# Allegro board MB1063.brd
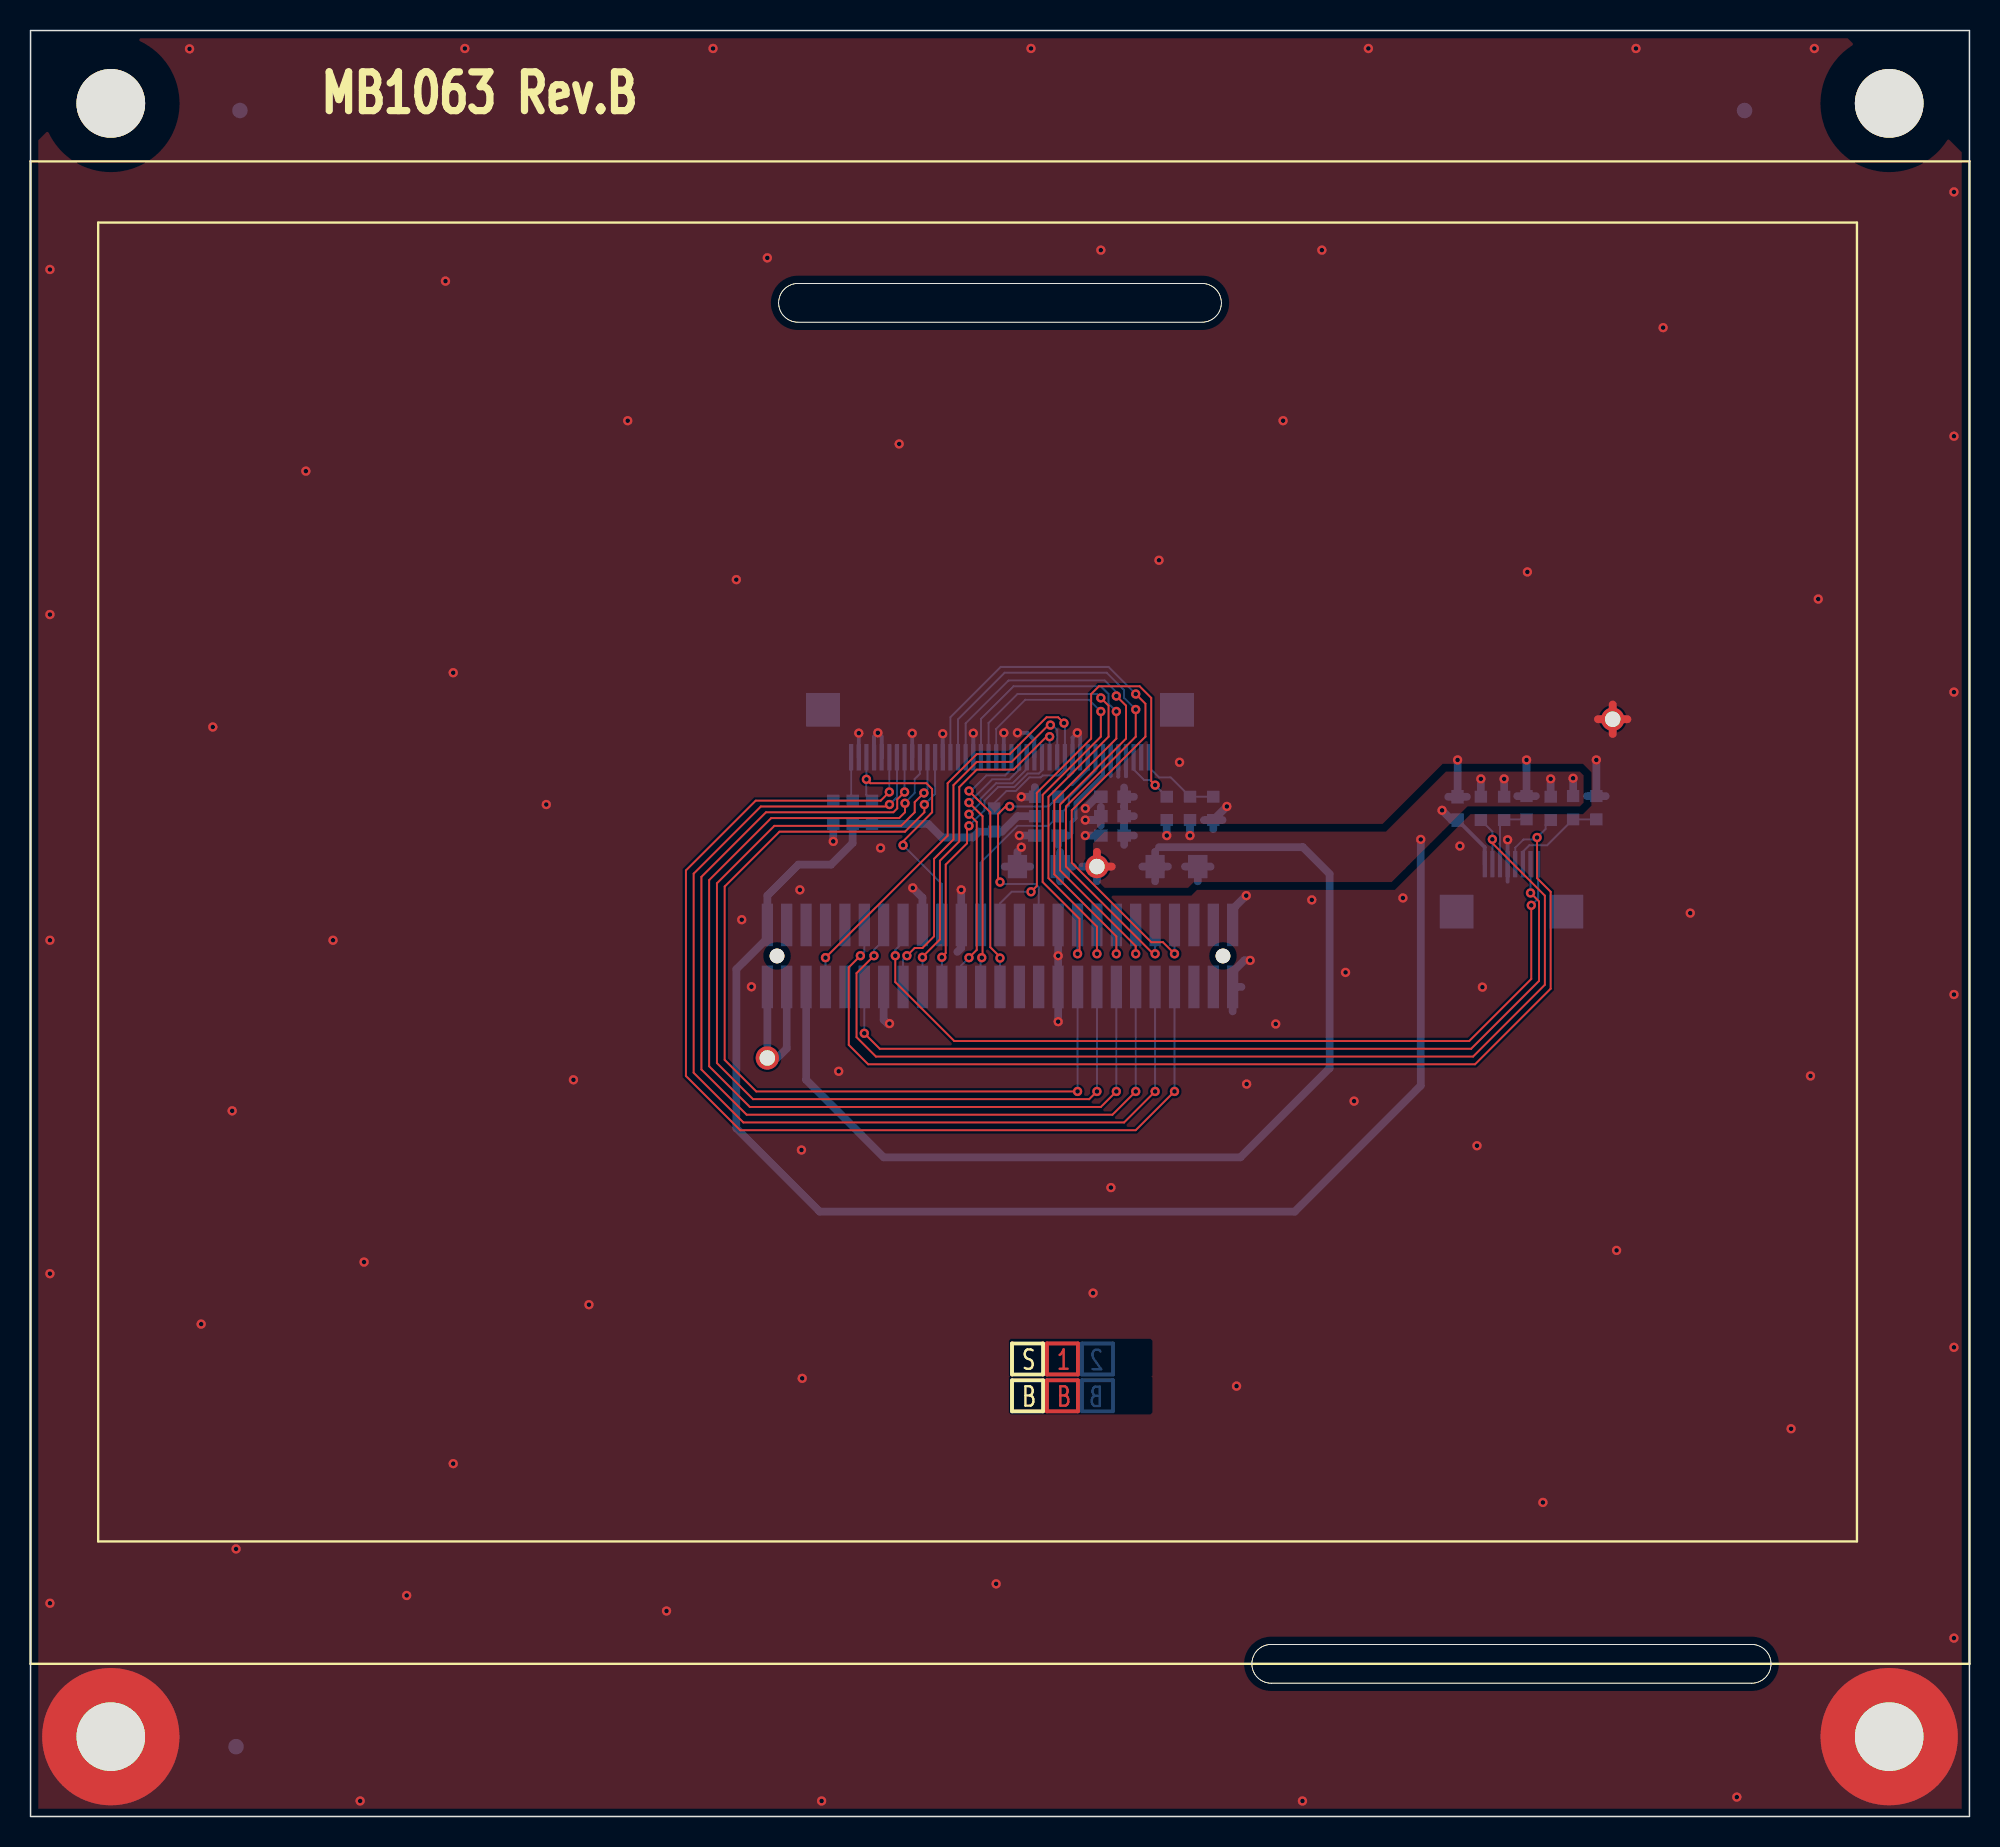
[diagram p0: board, top side]
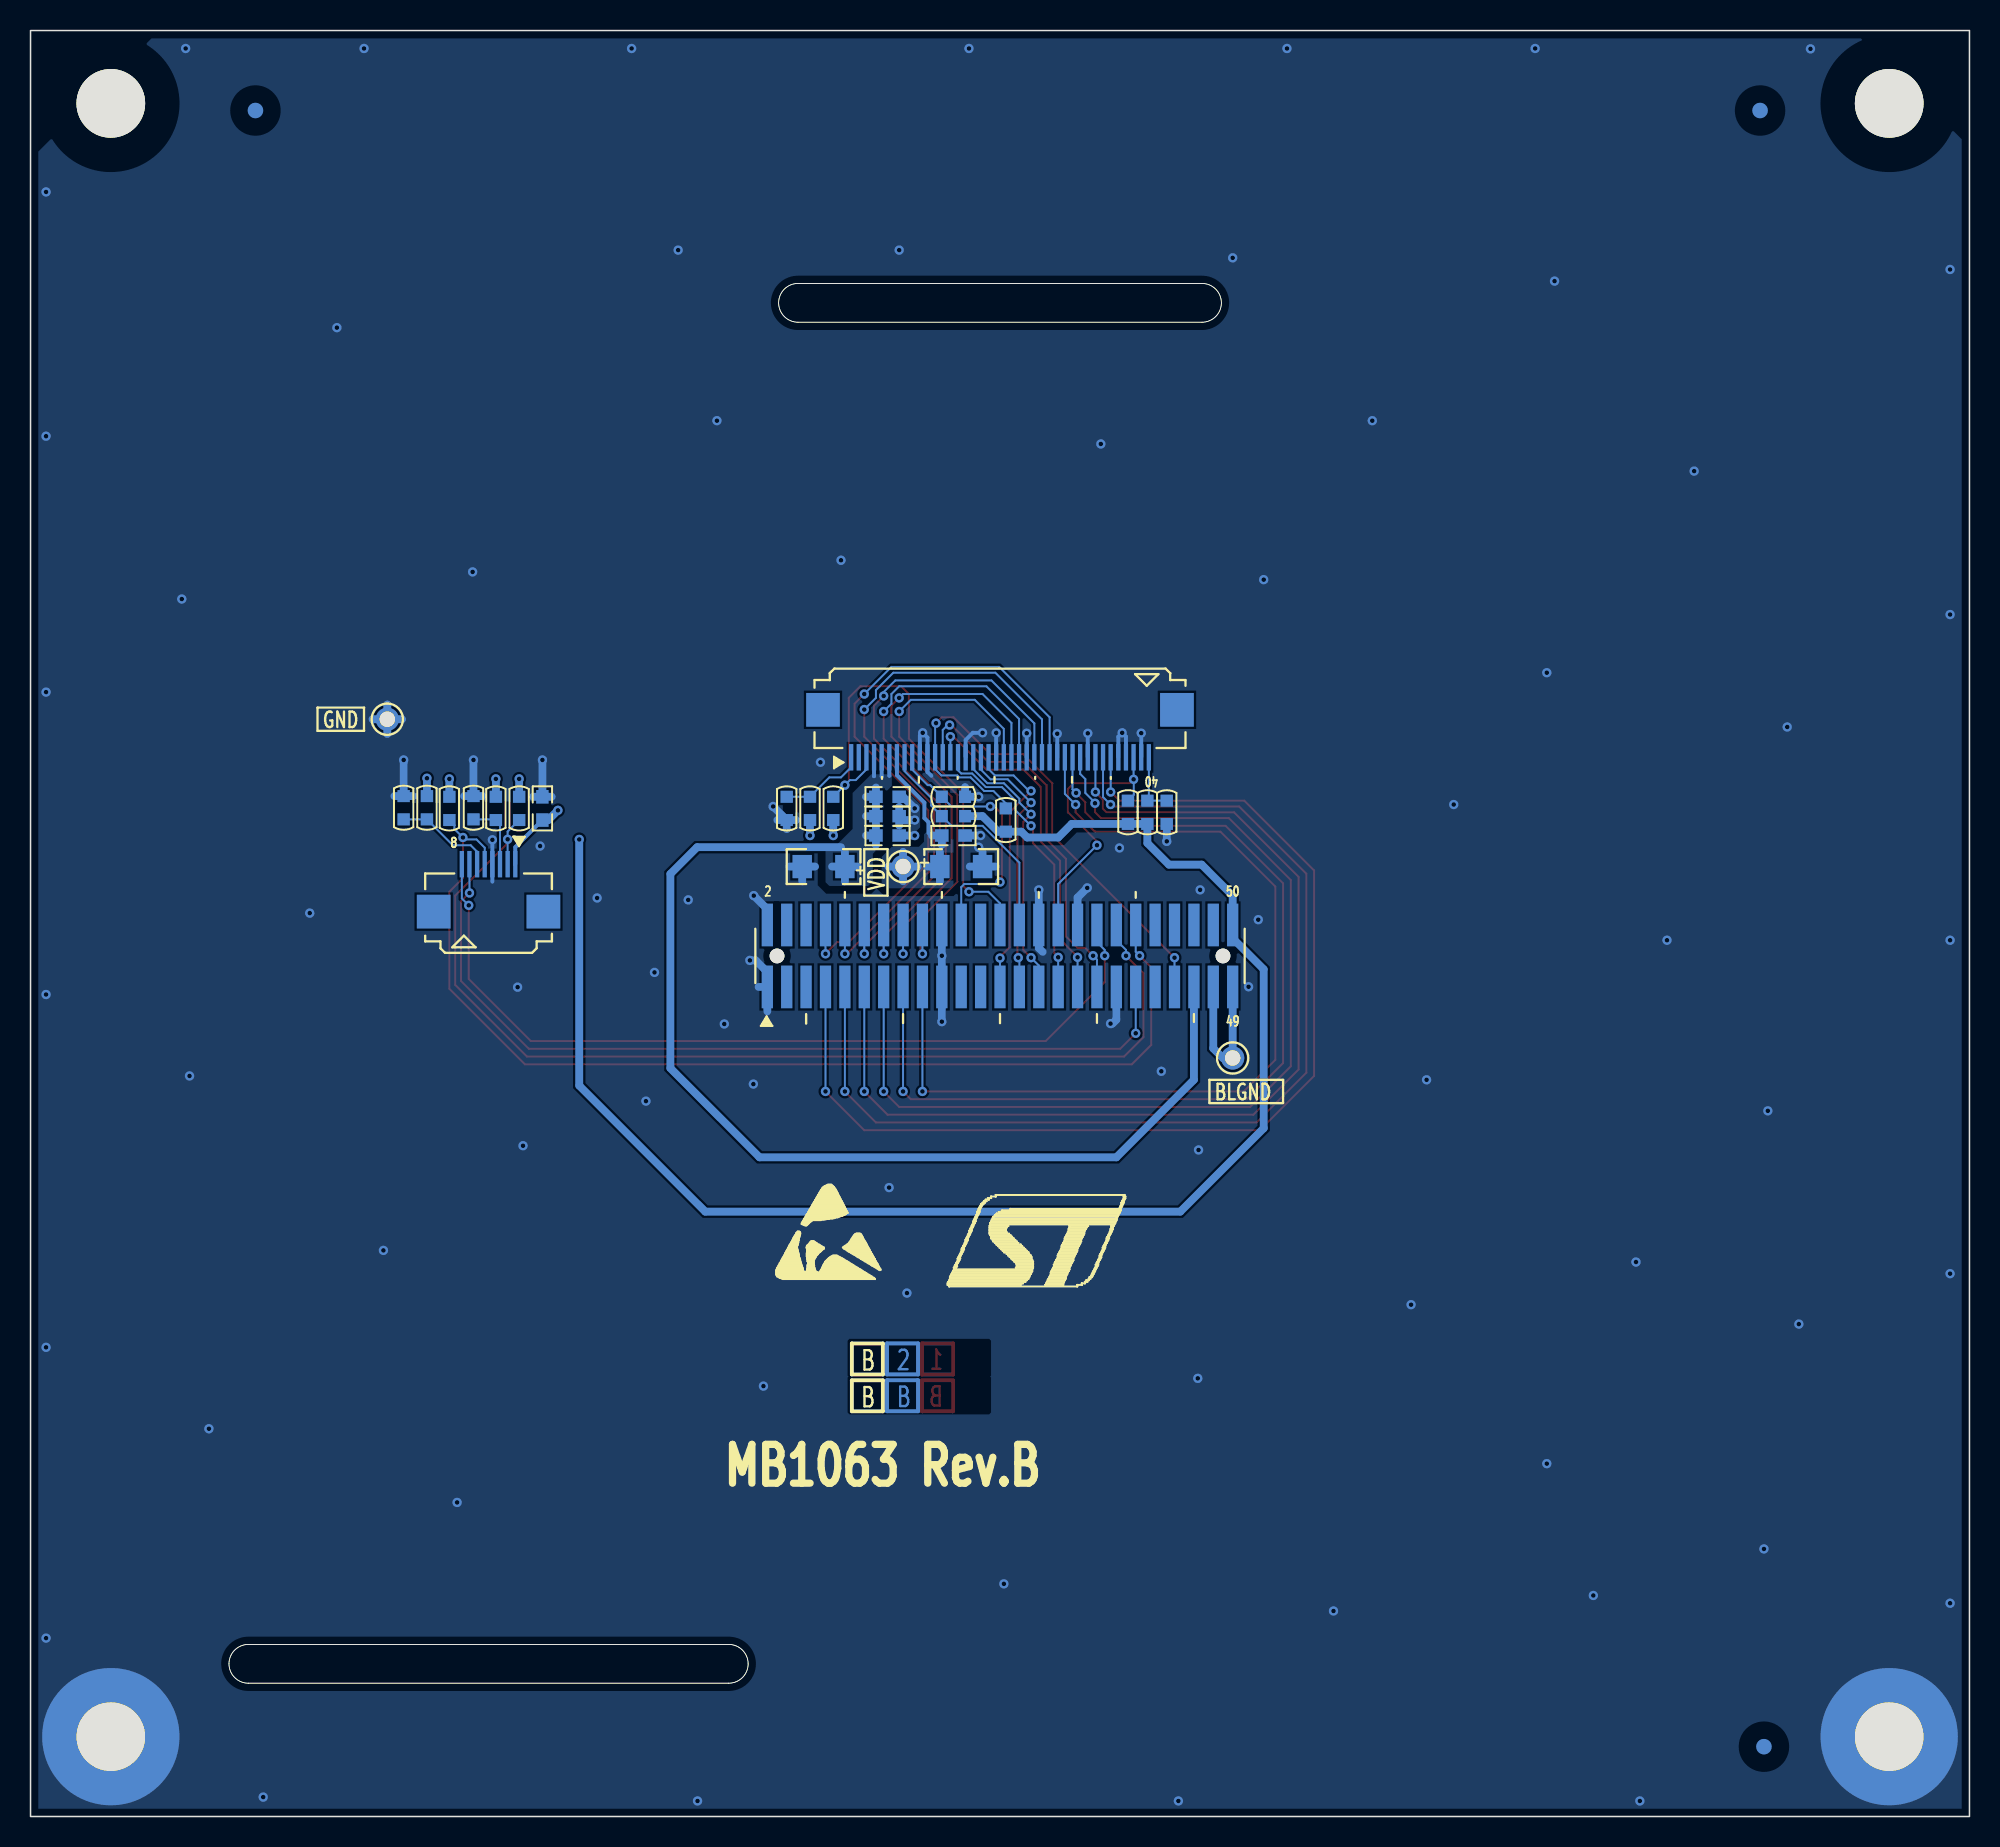
[diagram p1: board, bottom side, seen from below]

Outline 127 x 117 mm; copper layers: TOP, BOTTOM. Coordinates in mm from the lower left corner of the outline.
Outline path: rectangle 0,0 127,117 ; 49,99.16 arc(49.37,100.06) 50.27,100.43 ; 49,99.16 arc(49.37,100.06) 50.27,100.43 ; 49,99.16 arc(49.37,98.26) 50.27,97.89 ; 49,99.16 arc(49.37,98.26) 50.27,97.89 ; 50.27,100.43 76.73,100.43 ; 50.27,100.43 76.73,100.43 ; 76.73,100.43 arc(77.63,100.06) 78,99.16 ; 76.73,100.43 arc(77.63,100.06) 78,99.16 ; 50.27,97.89 76.73,97.89 ; 50.27,97.89 76.73,97.89 ; 76.73,97.89 arc(77.63,98.26) 78,99.16 ; 76.73,97.89 arc(77.63,98.26) 78,99.16 ; 80,10 arc(80.37,10.9) 81.27,11.27 ; 80,10 arc(80.37,10.9) 81.27,11.27 ; 80,10 arc(80.37,9.1) 81.27,8.73 ; 80,10 arc(80.37,9.1) 81.27,8.73 ; 81.27,11.27 112.73,11.27 ; 81.27,11.27 112.73,11.27 ; 112.73,11.27 arc(113.63,10.9) 114,10 ; 112.73,11.27 arc(113.63,10.9) 114,10 ; 81.27,8.73 112.73,8.73 ; 81.27,8.73 112.73,8.73 ; 112.73,8.73 arc(113.63,9.1) 114,10 ; 112.73,8.73 arc(113.63,9.1) 114,10 ; 0,117 127,117 127,0 0,0 0,117

## Placement (name value [footprint] x y rotation side)
C1  4.7uF  [TAN-A]  75.06 62.23 180 bottom
C2  100nF  [0603C]  70.87 66.8 0 bottom
C3  4.7uF  [TAN-A]  66.04 62.23 0 bottom
C4  100nF  [0603C]  66.55 64.26 0 bottom
C5  100nF  [0603C]  93.47 66.04 270 bottom
C6  100nF  [0603C]  70.87 64.26 0 bottom
C7  100nF  [0603C]  70.87 65.53 0 bottom
CN1  089H40-000000-G2-C  [FPC40_0R5_089H40LY-FPC_REV]  73.25 69.25 0 bottom
CN2  P127B-2_25MGF-079-1A  [FTSH-125-01-F-DV]  63.5 56.37 180 bottom
CN3  CSF-2481-081R  [FPC8_0R5_089H08_LY-FPC_REV]  95.25 62.53 180 bottom
H1  POSITION HOLE  [HOLE_C9D4R5]  121.74 5.23 0 top
H2  POSITION HOLE  [HOLE_C9D4R5]  5.26 5.23 0 top
NOREF  -  []  335.28 -81.28 0 top
NOREF#2  -  [unnamed#2]  5.26 112.23 0 top
NOREF#3  Value  []  63.5 59.22 0 top
NOREF#4  -  []  -13.34 -24.13 0 top
NOREF#5  -  [unnamed#2]  121.74 112.23 0 top
NOREF#6  -  []  182.12 73.66 0 top
NOREF#7  -  []  0 0 0 top
NOREF#8  -  []  65.1 26.85 0 top
NOREF#9  -  []  188.21 123.44 0 top
NOREF#10  -  []  65.1 29.26 0 top
NOREF#11  -  [unnamed#3]  112.27 111.76 180 bottom
NOREF#12  -  [unnamed#3]  13.72 111.76 180 bottom
NOREF#13  -  [unnamed#3]  13.46 4.57 180 bottom
R1  [N_A]  [0603R]  75.95 66.04 90 bottom
R2  4K7  [0603R]  53.85 65.79 90 bottom
R3  4K7  [0603R]  66.55 66.8 0 bottom
R4  4K7  [0603R]  55.12 65.79 90 bottom
R5  4K7  [0603R]  74.42 66.04 90 bottom
R6  4K7  [0603R]  66.55 65.53 0 bottom
R7  4K7  [0603R]  77.47 66.04 270 bottom
R8  [N_A]  [0603R]  52.58 65.79 270 bottom
R9  4K7  [0603R]  63.12 65.28 90 bottom
R11  [N_A]  [0603R]  99.57 66.04 270 bottom
R12  [N_A]  [0603R]  95 66.04 270 bottom
R13  [N_A]  [0603R]  101.04 66.08 270 bottom
R14  [N_A]  [0603R]  96.52 66.04 270 bottom
R15  4K7  [0603R]  102.56 66.08 90 bottom
R16  4K7  [0603R]  97.99 66.08 90 bottom
TP1  mco1  [TP]  103.63 71.88 180 bottom
TP2  mco1  [TP]  48.26 49.69 180 bottom
TP3  mco1  [TP]  69.85 62.23 180 bottom

## Library data of the parts
C1 C3 = TAN-A
C2 C4-C7 = 0603C
CN1 = FPC40_0R5_089H40LY-FPC_REV
CN2 = FTSH-125-01-F-DV
CN3 = FPC8_0R5_089H08_LY-FPC_REV
H1 H2 = HOLE_C9D4R5
R1-R9 R11-R16 = 0603R
TP1-TP3 = TP

## Footprints (pads in the part's own frame, mm; a bottom-side part is the same pattern mirrored in y, then rotated)
0603C
  rect 0.889x0.813 smd: 1(-0.762,0) 2(0.762,0)
0603R
  rect 0.787x0.813 smd: 1(-0.762,0) 2(0.762,0)
FPC8_0R5_089H08_LY-FPC_REV
  rect 0.279x1.727 smd: 1(0,-0.14) 2(-0.5,-0.14) 3(-1,-0.14) 4(-1.5,-0.14) 5(-2,-0.14) 6(-2.5,-0.14) 7(-3,-0.14) 8(-3.5,-0.14)
  rect 2.21x2.21 smd: 9(-5.343,-3.25) 10(1.843,-3.25)
FPC40_0R5_089H40LY-FPC_REV
  rect 0.279x1.727 smd: 1(0,-0.14) 2(-0.5,-0.14) 3(-1,-0.14) 4(-1.5,-0.14) 5(-2,-0.14) 6(-2.5,-0.14) 7(-3,-0.14) 8(-3.5,-0.14) 9(-4,-0.14) 10(-4.5,-0.14) 11(-5,-0.14) 12(-5.5,-0.14) 13(-6,-0.14) 14(-6.5,-0.14) 15(-7,-0.14) 16(-7.5,-0.14) 17(-8,-0.14) 18(-8.5,-0.14) 19(-9,-0.14) 20(-9.5,-0.14) 21(-10,-0.14) 22(-10.5,-0.14) 23(-11,-0.14) 24(-11.5,-0.14) 25(-12,-0.14) 26(-12.5,-0.14) 27(-13,-0.14) 28(-13.5,-0.14) 29(-14,-0.14) 30(-14.5,-0.14) 31(-15,-0.14) 32(-15.5,-0.14) 33(-16,-0.14) 34(-16.5,-0.14) 35(-17,-0.14) 36(-17.5,-0.14) 37(-18,-0.14) 38(-18.5,-0.14) 39(-19,-0.14) 40(-19.5,-0.14)
  rect 2.21x2.21 smd: 41(-21.343,-3.25) 42(1.843,-3.25)
FTSH-125-01-F-DV
  round 0.965 hole 0.965 unplated: (-14.605,0) (14.605,0)
  rect 0.737x2.794 smd: 1(-15.24,-2.03) 2(-15.24,2.03) 3(-13.97,-2.03) 4(-13.97,2.03) 5(-12.7,-2.03) 6(-12.7,2.03) 7(-11.43,-2.03) 8(-11.43,2.03) 9(-10.16,-2.03) 10(-10.16,2.03) 11(-8.89,-2.03) 12(-8.89,2.03) 13(-7.62,-2.03) 14(-7.62,2.03) 15(-6.35,-2.03) 16(-6.35,2.03) 17(-5.08,-2.03) 18(-5.08,2.03) 19(-3.81,-2.03) 20(-3.81,2.03) 21(-2.54,-2.03) 22(-2.54,2.03) 23(-1.27,-2.03) 24(-1.27,2.03) 25(0,-2.03) 26(0,2.03) 27(1.27,-2.03) 28(1.27,2.03) 29(2.54,-2.03) 30(2.54,2.03) 31(3.81,-2.03) 32(3.81,2.03) 33(5.08,-2.03) 34(5.08,2.03) 35(6.35,-2.03) 36(6.35,2.03) 37(7.62,-2.03) 38(7.62,2.03) 39(8.89,-2.03) 40(8.89,2.03) 41(10.16,-2.03) 42(10.16,2.03) 43(11.43,-2.03) 44(11.43,2.03) 45(12.7,-2.03) 46(12.7,2.03) 47(13.97,-2.03) 48(13.97,2.03) 49(15.24,-2.03) 50(15.24,2.03)
HOLE_C9D4R5
  round 8.992 hole 4.496: 1(0,0)
TAN-A
  rect 1.27x1.524 smd: 1(1.397,0) 2(-1.397,0)
TP
  round 1.524 hole 1.016: 1(0,0)
unnamed#2
  round 4.496 hole 4.496 unplated: (0,0)
unnamed#3
  round 1.016 smd: (0,0)

## Nets
GND: C1.2 C2.1 C3.2 C4.1 C5.1 C6.1 C7.1 CN1.10 CN1.11 CN1.16 CN1.20 CN1.24 CN1.28 CN1.32 CN1.36 CN1.37 CN1.39 CN2.1 CN2.2 CN2.19 CN2.20 CN2.30 CN2.34 CN2.37 CN3.4 H1.1 H2.1 R3.1 R7.2 R8.2 R15.2 R16.2 TP1.1
VDD: C3.1 C4.2 C5.2 CN1.7 CN2.50 CN3.1 R1.1 R2.1 R4.1 R5.1 R6.1 R9.1 R11.1 R12.1 R13.1 R14.1 TP3.1
B2: CN1.19 CN2.25
B3: CN1.18 CN2.27
B4: CN1.17 CN2.29
B5: CN1.15 CN2.31
B6: CN1.14 CN2.33
B7: CN1.13 CN2.35
BL_CTRL: CN1.12 CN2.43 R9.2
BLGND: CN2.47 CN2.49 TP2.1
BLVDD: C1.1 C2.2 C6.2 C7.2 CN1.4 CN1.5 CN1.6 CN2.45
CLK: CN1.38 CN2.32 R4.2
ENB: CN1.9 CN2.22 R3.2
G2: CN1.27 CN2.8
G3: CN1.26 CN2.10
G4: CN1.25 CN2.12
G5: CN1.23 CN2.14
G6: CN1.22 CN2.16
G7: CN1.21 CN2.18
HSYNC: CN1.3 CN2.26 R5.2
I2C_SCL: CN2.40 CN3.5 R11.2
I2C_SDA: CN2.38 CN3.2 R12.2
INT: CN2.39 CN3.7
NETCN1_1: CN1.1 R1.2 R7.1
NETCN1_40: CN1.40 R2.2 R8.1
NETCN3_3: CN3.3 R14.2 R16.1
NETCN3_6: CN3.6 R13.2 R15.1
R2: CN1.35 CN2.7
R3: CN1.34 CN2.9
R4: CN1.33 CN2.11
R5: CN1.31 CN2.13
R6: CN1.30 CN2.15
R7: CN1.29 CN2.17
RST: CN2.36 CN3.8
VSYNC: CN1.8 CN2.28 R6.2

Pads without a net: CN1 2 41 42; CN2 3 4 5 6 21 23 24 41 42 44 46 48; CN3 9 10

## Via types
v1: diameter 0.61, hole 0.305, TOP to BOTTOM, 161 vias

## Routing (per net, layer and track width the routed paths; a pad name or vN(x,y) marks a point on that pad's centre or on a via; arc(x,y) is an arc through that point)
GND: length 79.2
  TOP w0.508: TP1.1 103.63,72.85 ; TP1.1 104.6,71.88 ; TP1.1 102.67,71.88 ; TP1.1 103.63,70.92
  BOTTOM w0.254: 68,68.17 68.25,68.43 CN1.11 68.25,70.68 v1(68.56,70.99) 68.75,70.81 CN1.10 ; CN1.28 v1(59.75,70.93) ; CN1.32 v1(57.75,70.96) ; CN1.36 55.75,70.74 v1(55.5,70.99) 55.25,70.74 CN1.37 ; CN1.16 65.75,70.52 65.28,70.99 v1(64.64,70.99) ; v1(96.75,63.98) CN3.4 96.75,61.24 ; CN1.24 v1(61.75,70.96) ; CN1.20 v1(63.75,70.99) ; CN1.39 v1(54.25,70.97)
  BOTTOM w0.508: 60.71,56.64 60.96,56.9 CN2.30 v1(60.96,60.71) ; v1(79.88,56.08) 79.5,56.08 78.74,55.32 CN2.1 ; v1(69.09,66.04) 69.85,66.8 C2.1 ; CN2.34 58.42,60.2 v1(57.78,60.83) ; 65.79,67.44 R3.1 v1(64.9,66.8) ; 76.86,65.28 R7.2 ; R7.2 77.47,64.68 ; R7.2 78.08,65.28 ; R7.2 v1(78.36,66.17) ; v1(56.26,51.94) 56.13,51.94 55.88,52.2 CN2.37 ; TP1.1 103.63,72.85 ; TP1.1 104.6,71.88 ; TP1.1 103.63,70.92 ; TP1.1 102.67,71.88 ; v1(67.31,52.07) CN2.19 v1(67.31,56.39) CN2.20 ; R15.2 v1(102.56,69.22) ; R15.2 103.17,66.85 ; R15.2 101.95,66.85 ; CN2.2 78.74,59.44 v1(79.63,60.33) ; 76.45,61.26 C1.2 ; C1.2 77.29,62.23 ; C1.2 75.62,62.23 ; R16.2 98.6,66.85 ; R16.2 97.38,66.85 ; R16.2 v1(97.99,69.22) ; CN2.1 79.31,54.34 ; CN2.1 78.74,52.74 ; 92.86,66.8 C5.1 ; C5.1 94.08,66.8 ; C5.1 v1(93.47,69.22) ; v1(69.09,65.28) 69.85,65.28 C7.1 ; C3.2 64.64,63.2 ; C3.2 63.8,62.23 ; C3.2 65.48,62.23 ; R8.2 v1(52.58,63.88) ; C7.1 70.1,66.14 ; C7.1 70.1,64.92 ; C4.1 v1(64.77,64.26) ; C6.1 v1(69.09,64.26)
  vias: v1(1.27,101.35) v1(1.27,78.74) v1(1.27,57.4) v1(1.27,35.56) v1(1.27,13.97) v1(10.41,115.8) v1(11.18,32.26) v1(11.94,71.37) v1(13.21,46.23) v1(13.46,17.53) v1(18.03,88.14) v1(19.81,57.4) v1(21.59,1.02) v1(21.84,36.32) v1(24.64,14.48) v1(27.18,100.58) v1(27.69,74.93) v1(27.69,23.11) v1(28.45,115.82) v1(33.78,66.29) v1(35.56,48.26) v1(36.58,33.53) v1(39.12,91.44) v1(41.66,13.46) v1(44.7,115.82) v1(46.23,81.03) v1(46.58,58.75) v1(47.22,54.36) v1(48.26,102.11) v1(50.39,60.71) v1(50.5,43.66) v1(50.55,28.7) v1(51.82,1.02) v1(52.93,48.82) v1(55.68,63.45) v1(56.9,89.92) v1(63.25,15.24) v1(64.9,63.5) v1(65.53,115.82) v1(69.6,34.29) v1(70.1,102.62) v1(70.76,41.2) v1(73.91,82.3) v1(75.26,69.06) v1(78.99,28.19) v1(79.65,47.98) v1(81.56,51.92) v1(82.04,91.44) v1(83.31,1.02) v1(83.92,60.05) v1(84.58,102.62) v1(86.13,55.3) v1(86.69,46.86) v1(87.63,115.82) v1(89.89,60.17) v1(93.62,63.58) v1(94.74,43.94) v1(95.1,54.33) v1(98.04,81.53) v1(99.06,20.57) v1(103.89,37.08) v1(105.16,115.82) v1(106.93,97.54) v1(108.71,59.18) v1(111.76,1.27) v1(115.32,25.4) v1(116.59,48.51) v1(116.84,115.82) v1(117.09,79.76) v1(125.98,106.43) v1(125.98,90.42) v1(125.98,73.66) v1(125.98,53.85) v1(125.98,30.73) v1(125.98,11.68)
VDD: length 131.1
  TOP w0.508: 69.85,63.2 TP3.1 70.82,62.23
  BOTTOM w0.254: CN3.1 95.25,63.5 C5.2 ; CN1.7 70.25,68.22 68.45,66.42 68.45,65.41 68.19,65.14 68.19,64.43
  BOTTOM w0.508: 67.44,61.26 67.44,62.23 ; 67.44,62.23 67.44,63.2 ; 67.44,62.23 68.28,62.23 ; R1.1 v1(75.95,64.26) ; R11.1 v1(99.57,67.97) ; R6.1 64.64,65.53 63.63,64.52 R9.1 62.1,64.52 61.72,64.14 59.69,64.14 58.8,65.02 R4.1 R2.1 53.85,63.77 52.44,62.36 50.29,62.36 48.26,60.33 CN2.50 48.26,57.53 46.23,55.5 46.23,45.09 51.69,39.62 82.8,39.62 91.06,47.88 v1(91.06,64.01) ; 68.88,62.23 TP3.1 ; TP3.1 69.85,63.2 ; TP3.1 69.85,61.26 ; TP3.1 70.82,62.23 ; R13.1 v1(101.04,68.02) ; v1(92.46,65.91) 93.09,65.28 C5.2 ; 67.31,63.65 C4.2 67.96,64.26 ; R14.1 v1(96.52,67.97) ; R5.1 v1(74.42,64.26) ; R12.1 v1(95,67.97)
B2: length 17.8
  TOP w0.127: v1(61.47,67.18) 62.87,65.79 62.87,56.95 63.5,56.31 v1(63.5,56.24)
  BOTTOM w0.127: CN2.25 v1(63.5,56.24) ; CN1.19 64.25,68.62 63.83,68.2 62.61,68.2 61.59,67.18 v1(61.47,67.18)
B3: length 17.5
  TOP w0.127: v1(62.31,56.26) 62.36,56.31 62.36,65.53 v1(61.47,66.42)
  BOTTOM w0.127: CN1.18 64.75,68.58 64.12,67.94 62.99,67.94 v1(61.47,66.42) ; v1(62.31,56.26) 62.23,56.18 CN2.27
B4: length 17.9
  TOP w0.127: v1(61.47,65.66) 61.98,65.15 61.98,56.77 v1(61.47,56.26)
  BOTTOM w0.127: v1(61.47,65.66) 62.23,66.42 62.23,66.67 63.25,67.69 64.33,67.69 65.25,68.62 CN1.17 ; CN2.29 60.96,55.75 v1(61.47,56.26)
B5: length 18.8
  TOP w0.127: v1(59.69,56.29) 59.69,56.31 59.94,56.57 59.94,62.36 61.34,63.75 61.34,64.77 v1(61.47,64.9)
  BOTTOM w0.127: CN2.31 v1(59.69,56.29) ; v1(61.47,64.9) 62.48,65.91 62.48,66.55 63.37,67.44 64.43,67.44 65.32,68.33 66.04,68.33 66.25,68.54 CN1.15
B6: length 22.7
  TOP w0.127: v1(58.42,56.29) 58.42,56.31 59.56,57.45 59.56,62.61 60.83,63.88 60.83,67.44 61.98,68.58 64.39,68.58 66.55,70.74 v1(66.75,70.74)
  BOTTOM w0.127: v1(66.75,70.74) CN1.14 ; CN2.33 v1(58.42,56.29)
B7: length 25.2
  TOP w0.127: v1(66.8,71.5) 66.67,71.5 64.26,69.09 61.98,69.09 60.45,67.56 60.45,64.01 59.18,62.74 59.18,57.66 58.42,56.9 57.91,56.9 v1(57.4,56.39)
  BOTTOM w0.127: v1(66.8,71.5) 66.93,71.5 67.25,71.18 CN1.13 ; v1(57.4,56.39) 57.15,56.13 CN2.35
BL_CTRL: length 35.2
  TOP w0.127: v1(67.69,71.63) 67.31,72.01 66.55,72.01 64.14,69.6 61.98,69.6 60.07,67.69 60.07,64.26 v1(52.07,56.26)
  BOTTOM w0.127: CN2.43 v1(52.07,56.26) ; R9.2 63.12,66.37 63.93,67.18 64.54,67.18 65.43,68.07 66.17,68.07 66.29,68.2 67.34,68.2 67.75,68.61 CN1.12 67.75,71.57 v1(67.69,71.63)
BLGND: length 10.2
  BOTTOM w0.508: CN2.47 49.53,50.32 48.9,49.69 TP2.1 CN2.49
BLVDD: length 82.5
  BOTTOM w0.254: CN1.4 71.75,68.15 71.75,68.15 ; 71.25,68.12 71.25,68.13 CN1.5 ; 70.74,68.17 70.75,68.18 CN1.6
  BOTTOM w0.508: C1.1 74.5,62.23 ; C1.1 72.82,62.23 ; C1.1 73.66,61.26 ; C1.1 73.66,63.2 ; C6.2 72.28,64.26 ; C6.2 71.63,64.87 ; C6.2 71.63,63.65 ; 71.63,64.92 C7.2 ; C7.2 71.63,66.14 ; C7.2 72.28,65.53 ; CN2.45 50.8,48.26 55.88,43.18 79.25,43.18 85.09,49.02 85.09,61.75 83.34,63.5 73.91,63.5 ; C2.2 71.63,67.41 ; C2.2 71.63,66.19 ; C2.2 72.28,66.8
CLK: length 18.3
  TOP w0.127: v1(54.75,67.94) 55,67.69 58.67,67.69 59.05,67.31 59.05,65.79 57.15,63.88 v1(57.15,63.63)
  BOTTOM w0.127: CN2.32 59.69,61.09 v1(57.15,63.63) ; CN1.38 v1(54.75,67.94) 54.74,67.93 54.74,66.93 R4.2
ENB: length 17.6
  TOP w0.127: v1(63.5,61.21) 63.37,61.34 63.37,65.67 63.87,66.17 v1(64.14,66.17)
  BOTTOM w0.127: CN2.22 66.04,60.88 65.84,61.09 63.63,61.09 v1(63.5,61.21) ; v1(64.14,66.17) 66.67,66.17 R3.2 68.07,67.56 68.23,67.56 69.25,68.58 CN1.9
G2: length 41.3
  TOP w0.127: v1(72.39,73.53) 73.03,72.9 73.03,70.74 68.2,65.91 68.2,62.48 73.41,57.28 74.17,57.28 v1(74.93,56.52)
  BOTTOM w0.127: CN1.27 60.25,72.01 63.55,75.31 70.61,75.31 v1(72.39,73.53) ; CN2.8 v1(74.93,56.52)
G3: length 39
  TOP w0.127: v1(73.66,56.52) 73.53,56.52 67.82,62.23 67.82,66.17 72.39,70.74 v1(72.39,72.52)
  BOTTOM w0.127: CN1.26 60.75,71.88 63.8,74.93 70.48,74.93 71.63,73.79 71.63,73.28 v1(72.39,72.52) ; CN2.10 v1(73.66,56.52)
G4: length 36.7
  TOP w0.127: v1(71.12,73.41) 71.75,72.77 71.75,70.61 67.44,66.29 67.44,61.98 72.39,57.02 v1(72.39,56.52)
  BOTTOM w0.127: CN1.25 61.25,71.61 64.06,74.42 70.36,74.42 71.12,73.66 v1(71.12,73.41) ; CN2.12 v1(72.39,56.52)
G5: length 34.5
  TOP w0.127: v1(71.12,72.39) 71.12,70.61 67.06,66.55 67.06,61.72 71.12,57.66 v1(71.12,56.52)
  BOTTOM w0.127: CN2.14 v1(71.12,56.52) ; v1(71.12,72.39) 70.61,72.9 70.61,73.53 70.1,74.04 64.39,74.04 62.25,71.9 CN1.23
G6: length 32.3
  TOP w0.127: v1(69.85,56.52) 69.85,58.29 66.67,61.47 66.67,66.8 70.61,70.74 70.61,72.77 v1(70.1,73.28)
  BOTTOM w0.127: v1(70.1,73.28) 69.85,73.53 64.64,73.53 62.75,71.64 CN1.22 ; CN2.16 v1(69.85,56.52)
G7: length 30.2
  TOP w0.127: v1(70.1,72.39) 70.1,70.74 66.29,66.93 66.29,61.21 68.71,58.8 68.71,56.64 v1(68.58,56.52)
  BOTTOM w0.127: v1(70.1,72.39) 69.34,73.15 65.15,73.15 63.25,71.25 CN1.21 ; v1(68.58,56.52) CN2.18
HSYNC: length 32.3
  TOP w0.127: v1(73.66,67.56) 73.41,67.82 73.41,73.28 72.64,74.04 69.98,74.04 69.47,73.53 69.47,70.61 65.91,67.06 65.91,60.96 v1(65.53,60.58)
  BOTTOM w0.127: CN1.3 72.25,68.59 72.95,67.89 73.33,67.89 v1(73.66,67.56) R5.2 ; v1(65.53,60.58) 64.26,60.58 63.5,59.82 CN2.26
I2C_SCL: length 71.4
  TOP w0.127: v1(54.36,56.39) 53.59,55.63 53.59,50.55 54.86,49.28 94.61,49.28 99.57,54.23 99.57,60.58 98.68,61.47 v1(98.68,64.14)
  BOTTOM w0.127: v1(54.36,56.39) 54.61,56.64 CN2.40 ; CN3.5 97.25,63.47 97.79,64.01 98.55,64.01 v1(98.68,64.14) 99.24,64.69 99.24,64.95 R11.2
I2C_SDA: length 69.8
  TOP w0.127: v1(95.75,64.02) 95.75,63.76 99.19,60.33 99.19,54.48 94.49,49.78 55.37,49.78 54.1,51.05 54.1,55.24 v1(55.24,56.39)
  BOTTOM w0.127: CN3.2 v1(95.75,64.02) 95.75,64.52 R12.2 ; v1(55.24,56.39) 55.24,56.77 55.88,57.4 CN2.38
INT: length 57.4
  TOP w0.127: v1(54.61,51.31) 55.63,50.29 94.36,50.29 98.81,54.74 98.81,59.94 v1(98.25,60.5)
  BOTTOM w0.127: CN3.7 v1(98.25,60.5) ; v1(54.61,51.31) CN2.39
NETCN1_1: length 5.7
  BOTTOM w0.127: R7.1 R1.2 74.68,68.07 73.91,68.07 73.25,68.74 CN1.1
NETCN1_40: length 4.2
  BOTTOM w0.127: CN1.40 53.75,66.65 R2.2 R8.1
NETCN3_3: length 4.5
  BOTTOM w0.127: R16.1 96.56,65.32 R14.2 96.25,65.01 CN3.3
NETCN3_6: length 6.5
  BOTTOM w0.127: CN3.6 97.75,63.21 98.17,63.63 99.34,63.63 R13.2 R15.1
R2: length 72.6
  TOP w0.127: v1(74.93,47.5) 72.39,44.96 46.48,44.96 42.93,48.51 42.93,61.98 47.5,66.55 55.68,66.55 v1(56.25,67.11)
  BOTTOM w0.127: CN2.7 v1(74.93,47.5) ; CN1.35 v1(56.25,67.11)
R3: length 70.3
  TOP w0.127: v1(73.66,47.5) 71.63,45.47 46.69,45.47 43.43,48.72 43.43,61.77 47.84,66.17 56.13,66.17 v1(56.26,66.29)
  BOTTOM w0.127: v1(56.26,66.29) 56.75,66.78 CN1.34 ; CN2.9 v1(73.66,47.5)
R4: length 68
  TOP w0.127: v1(57.25,67.11) 56.77,66.63 56.77,66.04 56.52,65.79 48.17,65.79 43.94,61.55 43.94,48.94 46.9,45.97 70.87,45.97 v1(72.39,47.5)
  BOTTOM w0.127: CN1.33 v1(57.25,67.11) ; CN2.11 v1(72.39,47.5)
R5: length 65.9
  TOP w0.127: v1(57.28,66.38) 57.28,66.38 57.28,65.79 56.9,65.41 48.51,65.41 44.45,61.34 44.45,49.15 47.11,46.48 70.1,46.48 v1(71.12,47.5)
  BOTTOM w0.127: CN2.13 v1(71.12,47.5) ; v1(57.28,66.38) 57.28,66.42 57.91,67.06 57.91,67.96 58.25,68.3 CN1.31
R6: length 63.5
  TOP w0.127: v1(69.85,47.5) 69.34,46.99 47.32,46.99 44.96,49.36 44.96,61.13 48.72,64.9 57.02,64.9 57.91,65.79 57.91,66.45 v1(58.52,67.05)
  BOTTOM w0.127: v1(58.52,67.05) 58.75,67.29 CN1.30 ; CN2.15 v1(69.85,47.5)
R7: length 61.2
  TOP w0.127: v1(58.55,66.29) 58.55,65.79 57.28,64.52 49.06,64.52 45.47,60.92 45.47,49.57 47.53,47.5 v1(68.58,47.5)
  BOTTOM w0.127: CN2.17 v1(68.58,47.5) ; CN1.29 59.25,67 v1(58.55,66.29)
RST: length 56.6
  TOP w0.127: v1(98.3,59.69) 98.3,54.86 94.23,50.8 60.5,50.8 56.64,54.66 v1(56.64,56.39)
  BOTTOM w0.127: CN3.8 98.75,60.14 v1(98.3,59.69) ; v1(56.64,56.39) 56.64,56.77 57.15,57.28 CN2.36
VSYNC: length 15.3
  BOTTOM w0.127: CN2.28 62.23,62.48 64.64,64.9 66.67,64.9 R6.2 68.01,66.23 68.01,66.74 69.75,68.48 CN1.8

## Copper pours and planes (outline as drawn; the poured copper is in the pictures)
GND on TOP: 0.51,0.51 126.49,0.51 126.49,109.02 119.02,116.49 7.19,116.49 0.51,109.81
GND on BOTTOM: 0.51,0.51 126.49,0.51 126.49,109.07 119.08,116.48 7.11,116.48 0.51,109.88 ; 13 cut-outs
VDD on TOP: 69.6,61.59 69.6,63.75 70.36,64.52 88.77,64.52 92.71,68.45 101.47,68.45 101.73,68.2 101.73,66.42 101.47,66.17 94.11,66.17 89.15,61.21 76.2,61.21 75.82,60.83 70.36,60.83
VDD on BOTTOM: 66.7,64.72 68.1,64.72 68.48,64.34 68.48,63.86 68.81,63.53 70.59,63.53 71.25,62.87 71.25,61.19 70.87,60.81 66.75,60.81 66.55,61.01 66.55,64.57
BLVDD on BOTTOM: 73.15,67.06 73.15,64.69 74.09,63.75 74.8,63.75 74.93,63.63 74.93,61.21 74.68,60.96 72.14,60.96 71.83,61.26 71.83,63.07 71.09,63.8 71.09,67.01 70.59,67.51 70.59,68.17 70.69,68.28 71.93,68.28

## Text on the board
Ref Des/Silkscreen Bottom: BLGND | GND | VDD | MB1063 Rev.B
Ref Des/Silkscreen Top: MB1063 Rev.B
User.8: FIGURE | SIZE | 12.0 | 40.0 | 177.0 | 38.0 | TOLERANCE | +3.0/-3.0 | +2.0/-2.0 | DRILL CHART: TOP to BOTTOM | ALL UNITS ARE IN MILS | PLATED | NON-PLATED | ROTATION | - | QTY | 161 | 3 | 2 | 170 | TOTAL HOLES:
